# Altium PCB Driver Controller Tester.PcbDoc
Units mil, origin at the board's own origin, x right, y up, seen from the top; angles counter-clockwise.
Board outline 3315 x 3238 mil, 2 copper layers (Top Layer, Bottom Layer); 69 components, 59 nets, 225 pads, 27 vias.
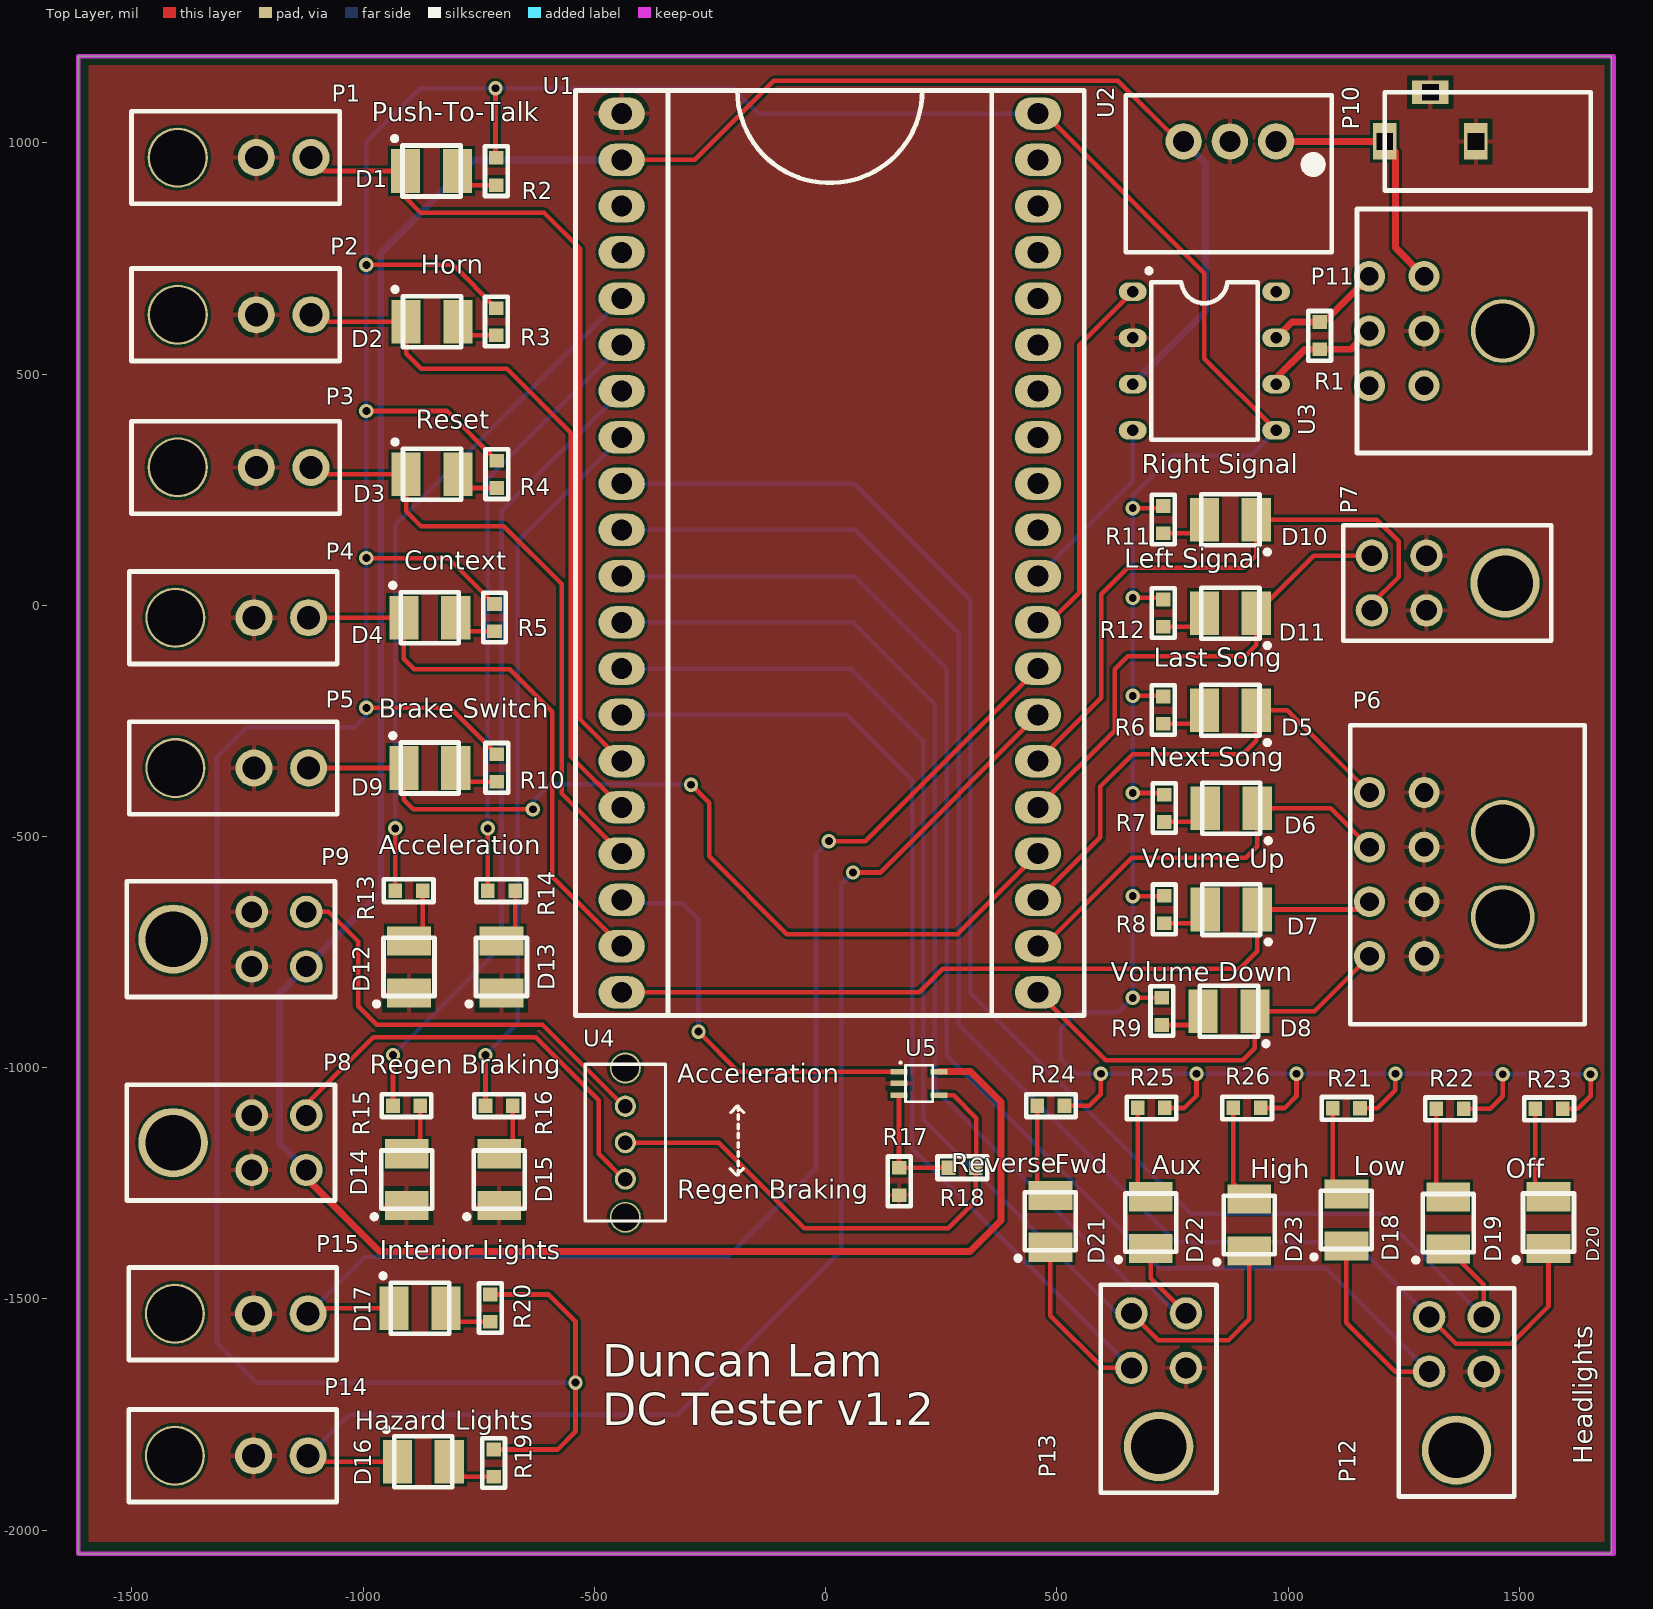
[diagram p0: Top Layer view]
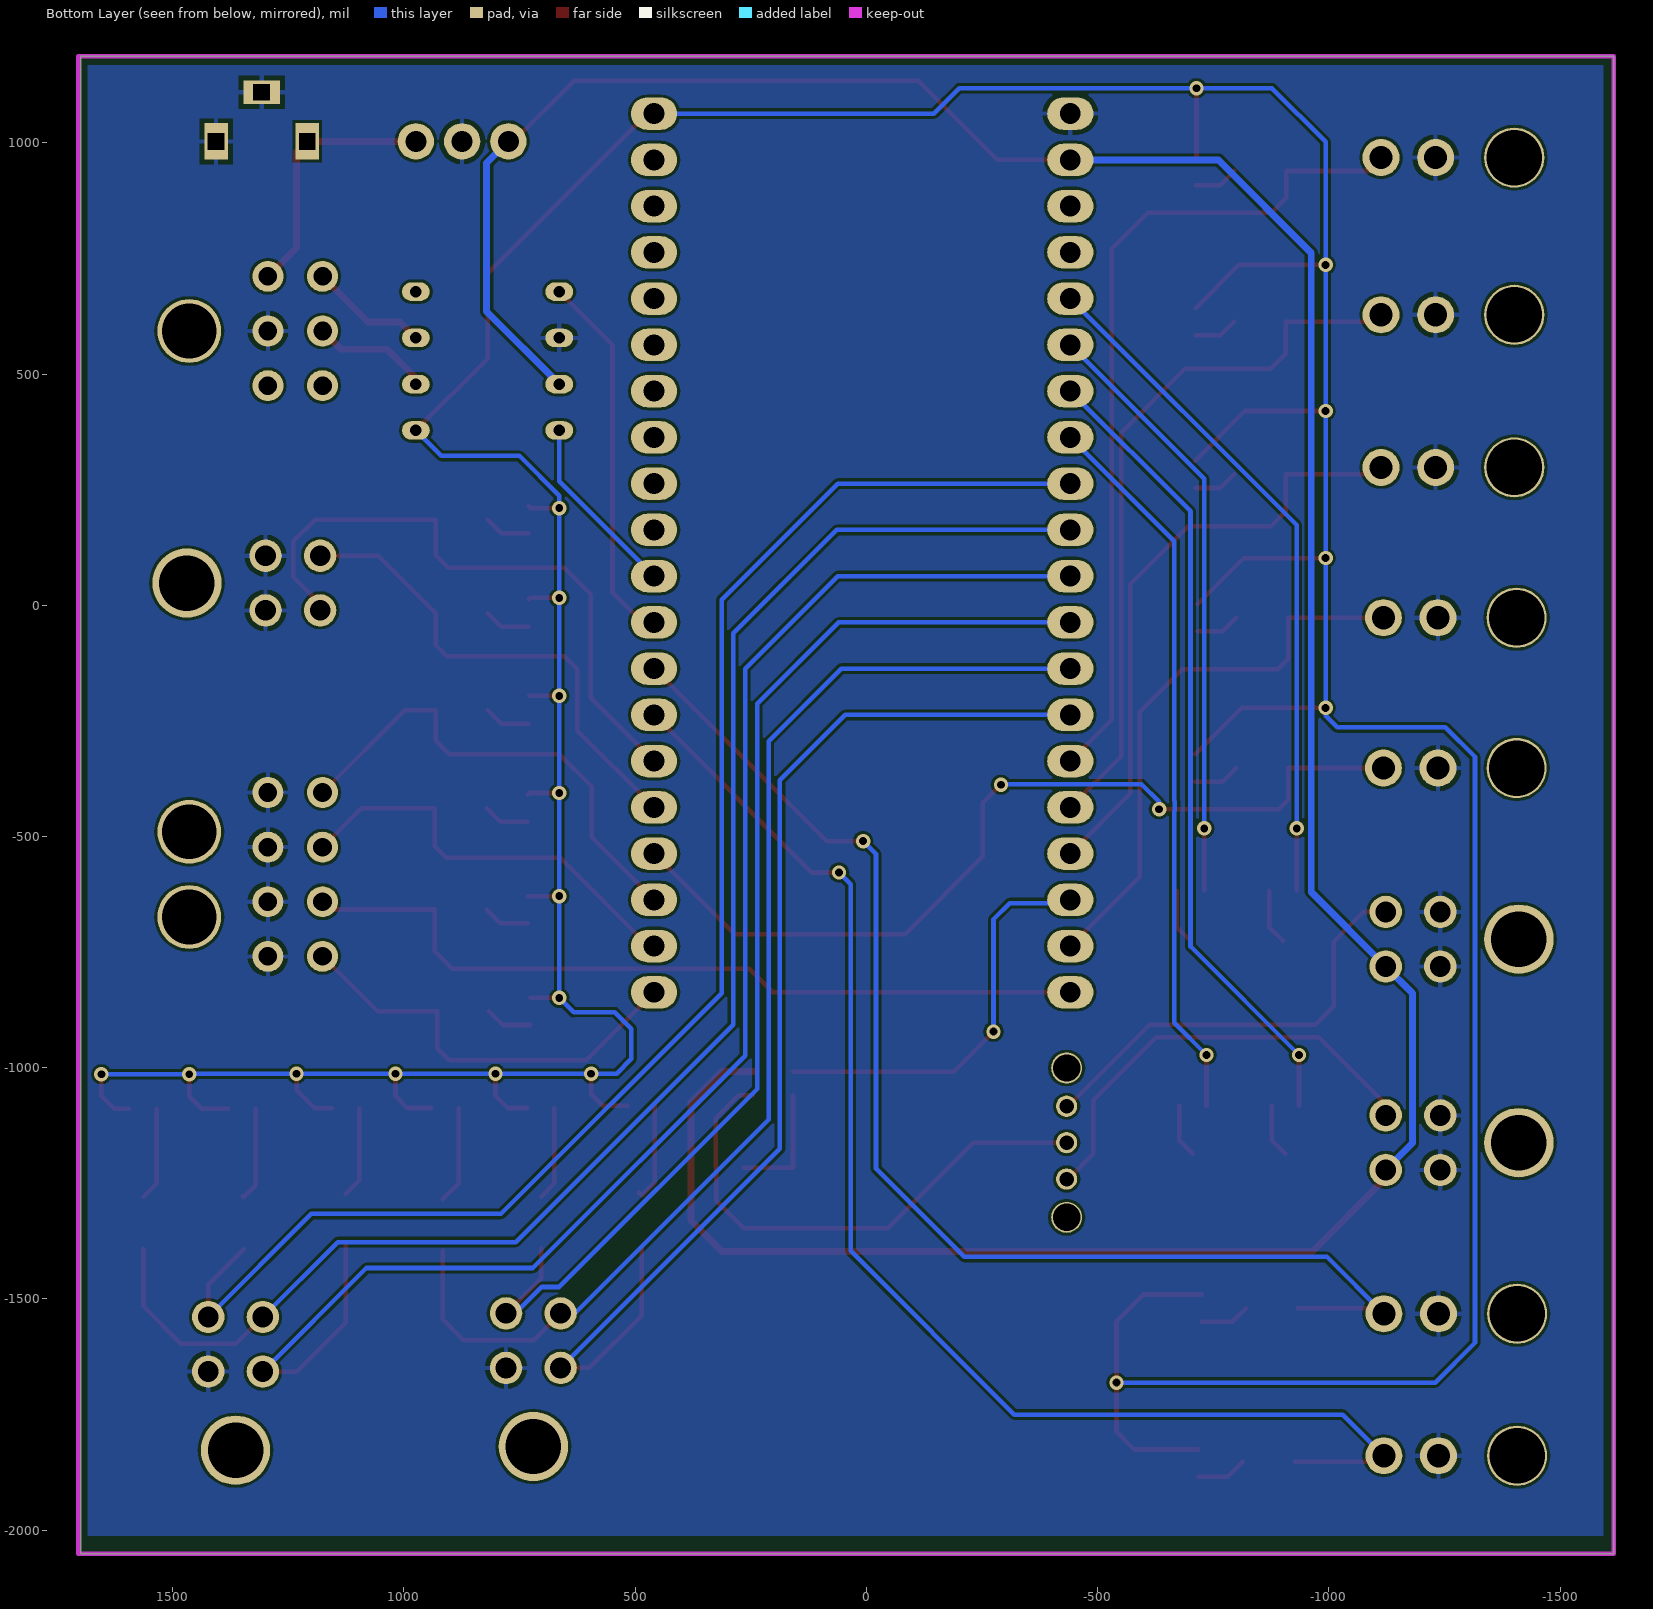
[diagram p1: Bottom Layer view, seen from below]
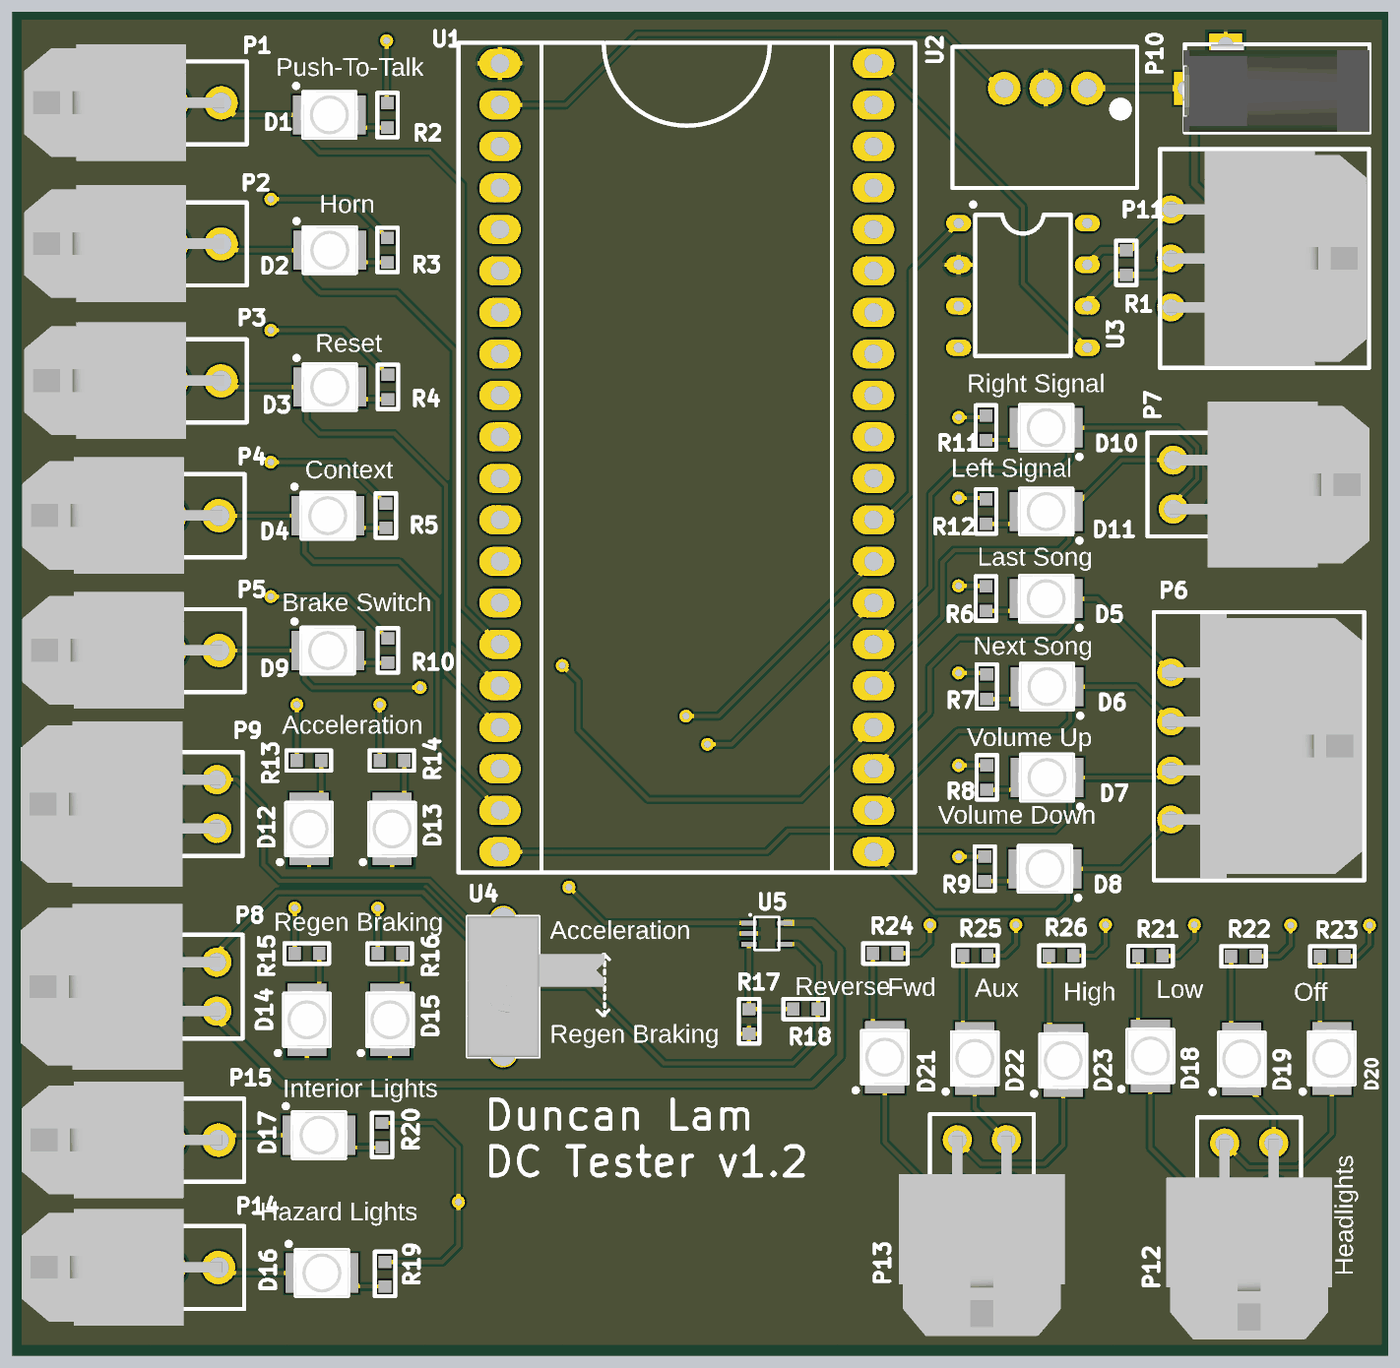
[diagram p2: 3D render of the assembled board from above, using the file's embedded part models]

## Layer stack, top to bottom
Top Solder: solder mask 0.4, Solder Resist, Dk 3.5
Top Layer: signal copper 1.4
Dielectric 1: dielectric 12.6, FR-4, Dk 4.8
Bottom Layer: signal copper 1.4
Bottom Solder: solder mask 0.4, Solder Resist, Dk 3.5

## Board outline
-1616,-2051 1699,-2051 1699,1187 -1616,1187

## Design rules (kind name [scope] priority, off if disabled: settings)
BoardOutlineClearance [All] p1: gap=15
Clearance [All] p1: gap=6
DiffPairsRouting [All] p1: maxlimit=10 minlimit=10 mostfreqgap=10 toplayer_minwidth=15 toplayer_maxwidth=15 toplayer_prefwidth=15 bottomlayer_minwidth=15 bottomlayer_maxwidth=15 bottomlayer_prefwidth=15 maxuncoupledlength=500
HoleSize [All] p1: absolutevalues=TRUE maxlimit=100 minlimit=13 maxpercent=80.000 minpercent=20.000
MinimumAnnularRing [All] p1: minimumring=7
PolygonConnect [All] p1: connectstyle=Relief reliefconductorwidth=10 reliefentries=4 polygonreliefangle="90 Angle" airgapwidth=10
RoutingVias [All] p1: holewidth=28 width=50 viastyle="Through Hole" minholewidth=28 minwidth=50 maxholewidth=28 maxwidth=50
SolderMaskExpansion [All] p1: expansion=4
Width 12V [(InNet('12V') AND InNet('5V'))] p1: maxlimit=20 minlimit=15 preferedwidth=16
Width Width_1 [All] p2: maxlimit=15 minlimit=10 preferedwidth=10
28 further rules are at their usual default settings.

## Classes and differential pairs
component class "Driver Controller Tester": D12 D13 D14 D15 P8 P9 P10 P11 R1 R13 R14 R15 R16 R17 R18 U1 U2 U3 U4 U5
component class Connectors: D1 D2 D3 D4 D5 D6 D7 D8 D9 D10 D11 D16 D17 D18 D19 D20 D21 D22 D23 P1 P2 P3 P4 P5 P6 P7 P12 P13 P14 P15 R2 R3 R4 R5 R6 R7 R8 R9 R10 R11 R12 R19 R20 R21 R22 R23 R24 R25 R26
differential pair CAN1: +CAN1_P -CAN1_N

## Components (designator, comment, footprint, x,y, rotation, side; value= is the part's Value field where it differs from the comment)
D1 "LED RED" "RED LED" -852,939 r270 top
D2 "LED RED" "RED LED" -851,613 r270 top
D3 "LED RED" "RED LED" -851,283 r270 top
D4 "LED RED" "RED LED" -856,-27 r270 top
D5 "LED RED" "RED LED" 875,-227 r90 top
D6 "LED RED" "RED LED" 877,-439 r90 top
D7 "LED RED" "RED LED" 877,-658 r90 top
D8 "LED RED" "RED LED" 872,-878 r90 top
D9 "LED RED" "RED LED" -856,-352 r270 top
D10 "LED RED" "RED LED" 875,185 r90 top
D11 "LED RED" "RED LED" 875,-17 r90 top
D12 "LED RED" "RED LED" -901,-782 r0 top
D13 "LED RED" "RED LED" -701,-782 r0 top
D14 "LED RED" "RED LED" -906,-1242 r0 top
D15 "LED RED" "RED LED" -706,-1242 r0 top
D16 "LED RED" "RED LED" -870,-1852 r270 top
D17 "LED RED" "RED LED" -877,-1520 r270 top
D18 "LED RED" "RED LED" 1126,-1329 r0 top
D19 "LED RED" "RED LED" 1346,-1336 r0 top
D20 "LED RED" "RED LED" 1563,-1335 r0 top
D21 "LED RED" "RED LED" 486,-1332 r0 top
D22 "LED RED" "RED LED" 703,-1335 r0 top
D23 "LED RED" "RED LED" 916,-1340 r0 top
P1 "SCH_MLX_1X2" PCB_MLX_MICROFIT_1X2 -1401,968 r270 top
P2 "SCH_MLX_1X2" PCB_MLX_MICROFIT_1X2 -1401,628 r270 top
P3 "SCH_MLX_1X2" PCB_MLX_MICROFIT_1X2 -1401,298 r270 top
P4 "SCH_MLX_1X2" PCB_MLX_MICROFIT_1X2 -1406,-27 r270 top
P5 "SCH_MLX_1X2" PCB_MLX_MICROFIT_1X2 -1406,-352 r270 top
P6 "MICROFIT_4X2" PCB_MLX_MICROFIT_4X2 1294,-582 r90 top
P7 "MLX_MICROFIT_2X2" MLX_MICROFIT_2X2 1469,48 r90 top
P8 "MLX_MICROFIT_2X2" MLX_MICROFIT_2X2 -1411,-1162 r270 top
P9 "MLX_MICROFIT_2X2" MLX_MICROFIT_2X2 -1411,-722 r270 top
P10 "PJ-007" "BARREL JACK PJ007" 1209,1003 r180 top
P11 "CAN1" PCB_MLX_MICROFIT_3X2 1464,593 r90 top
P12 "MLX_MICROFIT_2X2" MLX_MICROFIT_2X2 1364,-1827 r0 top
P13 "MLX_MICROFIT_2X2" MLX_MICROFIT_2X2 720,-1819 r0 top
P14 "SCH_MLX_1X2" PCB_MLX_MICROFIT_1X2 -1407,-1839 r270 top
P15 "SCH_MLX_1X2" PCB_MLX_MICROFIT_1X2 -1407,-1532 r270 top
R1 "120" PCB_GENERIC_SMD_0603 1068,583 r270 top
R2 "SCH_GENERIC_RESISTOR_0603" PCB_GENERIC_SMD_0603 -712,938 r90 top
R3 "SCH_GENERIC_RESISTOR_0603" PCB_GENERIC_SMD_0603 -712,613 r90 top
R4 "SCH_GENERIC_RESISTOR_0603" PCB_GENERIC_SMD_0603 -711,283 r90 top
R5 "SCH_GENERIC_RESISTOR_0603" PCB_GENERIC_SMD_0603 -716,-27 r90 top
R6 "SCH_GENERIC_RESISTOR_0603" PCB_GENERIC_SMD_0603 730,-227 r90 top
R7 "SCH_GENERIC_RESISTOR_0603" PCB_GENERIC_SMD_0603 732,-439 r90 top
R8 "SCH_GENERIC_RESISTOR_0603" PCB_GENERIC_SMD_0603 732,-658 r90 top
R9 "SCH_GENERIC_RESISTOR_0603" PCB_GENERIC_SMD_0603 727,-878 r90 top
R10 "SCH_GENERIC_RESISTOR_0603" PCB_GENERIC_SMD_0603 -711,-352 r90 top
R11 "SCH_GENERIC_RESISTOR_0603" PCB_GENERIC_SMD_0603 730,185 r90 top
R12 "SCH_GENERIC_RESISTOR_0603" PCB_GENERIC_SMD_0603 730,-17 r90 top
R13 "SCH_GENERIC_RESISTOR_0603" PCB_GENERIC_SMD_0603 -901,-617 r180 top
R14 "SCH_GENERIC_RESISTOR_0603" PCB_GENERIC_SMD_0603 -701,-617 r180 top
R15 "SCH_GENERIC_RESISTOR_0603" PCB_GENERIC_SMD_0603 -906,-1082 r180 top
R16 "SCH_GENERIC_RESISTOR_0603" PCB_GENERIC_SMD_0603 -706,-1082 r180 top
R17 "SCH_GENERIC_RESISTOR_0603" PCB_GENERIC_SMD_0603 159,-1246 r90 top
R18 "SCH_GENERIC_RESISTOR_0603" PCB_GENERIC_SMD_0603 295,-1216 r0 top
R19 "SCH_GENERIC_RESISTOR_0603" PCB_GENERIC_SMD_0603 -718,-1855 r90 top
R20 "SCH_GENERIC_RESISTOR_0603" PCB_GENERIC_SMD_0603 -725,-1520 r90 top
R21 "SCH_GENERIC_RESISTOR_0603" PCB_GENERIC_SMD_0603 1126,-1088 r0 top
R22 "SCH_GENERIC_RESISTOR_0603" PCB_GENERIC_SMD_0603 1350,-1089 r0 top
R23 "SCH_GENERIC_RESISTOR_0603" PCB_GENERIC_SMD_0603 1564,-1089 r0 top
R24 "SCH_GENERIC_RESISTOR_0603" PCB_GENERIC_SMD_0603 487,-1082 r0 top
R25 "SCH_GENERIC_RESISTOR_0603" PCB_GENERIC_SMD_0603 704,-1087 r0 top
R26 "SCH_GENERIC_RESISTOR_0603" PCB_GENERIC_SMD_0603 911,-1087 r0 top
U1 "LPC1768 mbed" "LPC 1768 mbed Layout" 9,113 r0 top
U2 "R78E-1.0 DC/DC" R78-1.0 874,1003 r180 top
U3 "MCP2562" MCP2562 819,528 r0 top
U4 "Slide Switch" "Slide Switch" -433,-1162 r0 top
U5 "MCP6001U" MCP6001UT 202,-1034 r0 top

## Footprints (in the part's own frame and the unit in brackets; to place one, negate y for a bottom-side part, rotate by r counter-clockwise, add the part's x,y. Pads: shape width x height; smd on the part's side, far side on the other; paste and mask are expansions set on the pad)
"BARREL JACK PJ007" [mm] "Pin connections for Barrel Jack"
  rect 1.3x2 hole 0.9 square: 1(0,0) 2(-5,0)
  rect 2x1.3 hole 0.9 square: 3(-2.5,-2.7)
  silkscreen extent -11.3,-2.7 0,2.7, body extent -11.31,-2.68 0.14,2.67, height 7.4
"LPC 1768 mbed Layout" [mil]
  oval 100x70 hole 45: 1(-450,950) 2(-450,850) 3(-450,750) 4(-450,650) 5(-450,550) 6(-450,450) 7(-450,350) 8(-450,250) 9(-450,150) 10(-450,50) 11(-450,-50) 12(-450,-150) 13(-450,-250) 14(-450,-350) 15(-450,-450) 16(-450,-550) 17(-450,-650) 18(-450,-750) 19(-450,-850) 20(-450,-950) 21(450,-950) 22(450,-850) 23(450,-750) 24(450,-650) 25(450,-550) 26(450,-450) 27(450,-350) 28(450,-250) 29(450,-150) 30(450,-50) 31(450,50) 32(450,150) 33(450,250) 34(450,350) 35(450,450) 36(450,550) 37(450,650) 38(450,750) 39(450,850) 40(450,950)
  silkscreen extent -550,-1000 550,1000, body extent -545,-990 545,1000, height 260
MCP2562 [mil]
  oval 60x40 hole 25: 1(-155,150) 2(-155,50) 3(-155,-50) 4(-155,-150) 5(155,-150) 6(155,-50) 7(155,50) 8(155,150)
  silkscreen extent -125,-170 115,200, body extent -115,-170 115,170, height 210
MCP6001UT [mm]
  rect 0.95x0.3 smd: 1(-1.1,0.65) 2(-1.1,0) 3(-1.1,-0.65) 4(1.1,-0.65) 5(1.1,0.65)
  silkscreen extent -1.04,-1 0.75,1.17
MLX_MICROFIT_2X2 [mil]
  round 70 hole 45: 1(59,170) 2(-59,170) 3(59,288) 4(-59,288)
  round 150 hole 120: ""(0,0)
  silkscreen extent -125,-100 125,350, body extent -200,-185 200,297, height 345
PCB_GENERIC_SMD_0603 [mm]
  rect 0.75x0.8 smd: 1(-0.75,0) 2(0.75,0)
  silkscreen extent -1.35,-0.63 1.38,0.63, body extent -0.75,-0.5 0.75,0.5, height 0.45
PCB_MLX_MICROFIT_1X2 [mil]
  round 80 hole 50: 1(0,170) 2(0,288)
  round 130 hole 120: ""(0,0)
  silkscreen extent -100,-100 100,350, body extent -141,-186 140,296, height 345
PCB_MLX_MICROFIT_3X2 [mm]
  round 1.7 hole 1.02: 1(3,4.32) 2(0,4.32) 3(-3,4.32) 4(3,7.32) 5(0,7.32) 6(-3,7.32)
  round 3.5 hole 3: ""(0,0)
  silkscreen extent -6.7,-4.8 6.7,8, body extent -6.57,-4.65 6.58,7.59, height 8.83
PCB_MLX_MICROFIT_4X2 [mm] "Molex MicroFit 4x2 Connector"
  round 3.5 hole 3: 0(-2.34,-4.32) 0(2.34,-4.32)
  round 1.7 hole 1.02: 1(4.5,0) 2(1.5,0) 3(-1.5,0) 4(-4.5,0) 5(4.5,3) 6(1.5,3) 7(-1.5,3) 8(-4.5,3)
  silkscreen extent -8.23,-8.82 8.2,4.05, body extent -8.07,-8.7 8.08,3.54, height 8.83
R78-1.0 [mm]
  round 2 hole 1.15: 1(-2.54,0) 2(0,0) 3(2.54,0)
  silkscreen extent -5.59,-2.54 5.71,6.1, body extent -4.44,-1.59 4.45,5.4, height 10.4
"RED LED" [mm]
  rect 2.4x1.6 smd: 1(0,-1.425) 2(0,1.425)
  silkscreen extent -1.9,-2.16 1.4,1.6, body extent -1.4,-1.75 1.4,1.75, height 1.88
"Slide Switch" [mm]
  round 1.168 hole 0.8: 1(0,2) 2(0,0) 3(0,-2)
  round 1.7 hole 1.5: ""(0,-4.1) ""(0,4.1)
  silkscreen extent -2.2,-4.3 6.2,4.3, body extent -2.2,-4.3 6.2,4.3, height 4.7

## Part data
P6: library part SCH_MLX_MICROFIT_4X2, "Molex Microfit Connector 4x2"
P10: library part Component_1
P11: library part SCH_MLX_MICROFIT_3X2
R1: library part SCH_GENERIC_RESISTOR_0603, "120 Ohms"
R2 R3 R4 R5 R6 R7 R8 R9 R10 R11 R12 R13 R14 R15 R16 R17 R18 R19 R20 R21 R22 R23 R24 R25 R26: "Generic SMD resistor 0603"
U2: library part R78E-1.0

## Via types
v1: diameter 31, hole 17, Top Layer to Bottom Layer, 27 vias

## Nets (pads, with @x,y where several pads share a name; then routed paths per layer and width w, separated by ;. In a path a pad name is that pad's centre, name@x,y a point inside that pad or via, vN(x,y) a via of type N, cw(c..) or ccw(c..) an arc to the next point about the centre after c; other vN are vias at no path point)
3.3V: R2.2 R3.2 R4.2 R5.2 R6.2 R7.2 R8.2 R9.2 R10.2 R11.2 R12.2 R19.2 R20.2 R21.2 R22.2 R23.2 R24.2 R25.2 R26.2 U1.40 U3.5 | length 12236.8
  Top Layer w10: v1(-993,-222) -811.47,-222 R10.2 ; v1(-993,102) -815.47,102 R5.2 ; v1(-993,420) -818.47,420 R4.2 ; v1(-993,736) -805.47,736 R3.2 ; R20.2 -598.53,-1490.47 -541,-1548 v1(-541,-1681) -541,-1787 -579.47,-1825.47 R19.2 ; v1(-714,1118) -714,969.53 R2.2 ; U1.40 474,1063 819,718 819,533 U3.5 ; R24.2 570,-1082 595,-1057 v1(595,-1013) ; v1(664,-849) R9.2@726.47,-849 ; v1(664,-629) R8.2@731.47,-629 ; v1(664,-406) 728.53,-406 R7.2 ; v1(664,-196) R6.2@728.53,-196 ; v1(664,16) 726.53,16 R12.2 ; v1(664,210) 725.47,210 R11.2 ; R25.2 775,-1087 802,-1060 v1(802,-1013) ; R26.2 993,-1087 1018,-1062 v1(1018,-1013) ; R21.2 1193,-1088 1232,-1049 v1(1232,-1013) ; R22.2 1437,-1089 1464,-1062 v1(1464,-1014) ; R23.2 1626,-1089 1654,-1061 v1(1654,-1014)
  Bottom Layer w10: v1(-541,-1681) -1230,-1681 -1316,-1595 -1316,-328 -1252,-264 -1018,-264 -993,-239 v1(-993,-222) v1(-993,102) v1(-993,420) v1(-993,736) -993,1002 -877,1118 v1(-714,1118) -201,1118 -146,1063 U1.40 ; U3.5 919,323 750,323 664,237 v1(664,210) v1(664,16) v1(664,-196) v1(664,-406) v1(664,-629) v1(664,-849) 633,-880 544,-880 508,-916 508,-981 540,-1013 v1(595,-1013) v1(802,-1013) v1(1018,-1013) v1(1232,-1013) v1@1464,-1013 ; v1(1464,-1014) v1(1654,-1014)
5V: P8.3 P9.3 U1.2 U2.3 U3.3 U5.5 | length 6681.6
  Top Layer w10: U1.2 -283,963 -112,1134 632,1134 763,1003 U2.3
  Top Layer w15: P8.3 -1123,-1239 -965,-1397 312,-1397 379,-1330 379,-1074 313.41,-1008.41 U5.5
  Bottom Layer w15: P8.3 -1181,-1163 -1181,-839 P9.3 -962,-620 -962,762 -761,963 U1.2 ; U3.3 821,635 821,956 U2.3
12V: P10.1 P11.1 U2.1 | length 562.1
  Top Layer w15: U2.1 P10.1 1232,980 1232,773.03 P11.1
ACCELERATION: P9.4 U4.1 | length 943.1
  Top Layer w10: P9.4 -1075,-663 -1011,-727 -1011,-867 -971,-907 -612.26,-907 U4.1@-436,-1083.26
ANALOG_OUT: U1.18 U5.1 | length 895.9
  Top Layer w10: v1(-275,-922) -188.59,-1008.41 U5.1
  Bottom Layer w10: U1.18 -434,-644 -310,-644 -275,-679 v1(-275,-922)
AUX: D23.1 P13.4 U1.13 | length 2604.1
  Top Layer w10: P13.4 719,-1589 871,-1589 916,-1544 D23.1
  Bottom Layer w10: U1.13 54,-137 211,-294 211,-1112 630,-1531 P13.4
"BRAKE SWITCH": D9.1 P5.2 U1.24 | length 1961.8
  Top Layer w10: P5.2 D9.1 -912.1,-420.9 -892,-441 v1(-633,-441) ; v1(-291,-388) -252,-427 -252,-543 -84,-711 285,-711 U1.24
  Bottom Layer w10: v1(-633,-441) -633,-425 -595,-387 v1@-289,-387
CAN1_N: P11.5 R1.2 U3.6 | length 257.1
  Top Layer w15: U3.6 974,491 1036.47,553.47 R1.2 1136.28,553.47 P11.5
CAN1_P: P11.4 R1.1 U3.7 | length 256.9
  Top Layer w15: U3.7 1008.53,612.53 R1.1 1077.23,612.53 P11.4
CONTEXT: D4.1 P4.2 U1.19 | length 1232.3
  Top Layer w10: P4.2 D4.1 -912.1,-115.9 -890,-138 -683,-138 -591,-230 -591,-587 U1.19
FORWARD: D22.1 P13.3 U1.12 | length 2498.2
  Top Layer w10: D22.1 703,-1455 P13.3
  Bottom Layer w10: U1.12 60,-37 236,-213 236,-1046 664,-1474 702,-1474 759,-1531 P13.3
GND: D12.1 D13.1 D14.1 D15.1 P1.1 P2.1 P3.1 P4.1 P5.1 P6.1 P6.2 P6.3 P6.4 P7.1 P7.2 P8.1 P8.2 P9.1 P9.2 P10.2 P10.3 P11.2 P12.1 P13.1 P14.1 P15.1 R17.1 U1.1 U2.2 U3.2 U5.2
"HAZARD LIGHTS": D16.1 P14.2 U1.27 | length 2904.4
  Top Layer w10: P14.2 -1106,-1852 D16.1 ; v1(59,-578) 118,-578 U1.27
  Bottom Layer w10: P14.2 -1030,-1750 -320,-1750 34,-1396 34,-603 v1(59,-578)
"HEADLIGHTS HIGH": D18.1 P12.2 U1.11 | length 3337.6
  Top Layer w10: D18.1 1126,-1551 1232,-1657 P12.2
  Bottom Layer w10: U1.11 62,63 262,-137 262,-974 721,-1433 1081,-1433 P12.2
"HEADLIGHTS LOW": D19.1 P12.3 U1.9 | length 3287.7
  Top Layer w10: D19.1 1423,-1469.1 P12.3
  Bottom Layer w10: U1.9 62,263 313,12 313,-839 790,-1316 1200,-1316 P12.3
"HEADLIGHTS OFF": D20.1 P12.4 U1.10 | length 3387
  Top Layer w10: P12.4 1363,-1597 1482,-1597 1563,-1516 D20.1
  Bottom Layer w10: U1.10 64,163 288,-61 288,-907 758,-1377 1143,-1377 P12.4
HORN: D2.1 P2.2 U1.16 | length 1563.5
  Top Layer w10: P2.2 -1098,613 D2.1 -907.1,544.1 -874,511 -689,511 -551,373 -551,-327 U1.16
"INTERIOR LIGHTS": D17.1 P15.2 U1.28 | length 2745
  Top Layer w10: P15.2 -1107,-1520 D17.1 ; v1(7,-510) 86,-510 U1.28
  Bottom Layer w10: P15.2 -996,-1409 -212,-1409 -21,-1218 -21,-538 v1(7,-510)
"LAST SONG": D5.1 P6.5 U1.23 | length 1063.4
  Top Layer w10: U1.23 594,-502 594,-392 664,-322 902,-322 931.1,-292.9 D5.1 998.06,-227 P6.5
NetD1_2: D1.2 R2.1 | length 96.5
  Top Layer w10: D1.2 -765.37,908.47 R2.1
NetD2_2: D2.2 R3.1 | length 95.1
  Top Layer w10: D2.2 -765.37,583.47 R3.1
NetD3_2: D3.2 R4.1 | length 96.1
  Top Layer w10: D3.2 -765.37,253.47 R4.1
NetD4_2: D4.2 R5.1 | length 96.1
  Top Layer w10: D4.2 -770.37,-56.53 R5.1
NetD5_2: D5.2 R6.1 | length 101.1
  Top Layer w10: R6.1 789.37,-256.53 D5.2
NetD6_2: D6.2 R7.1 | length 101.1
  Top Layer w10: R7.1 791.37,-468.53 D6.2
NetD7_2: D7.2 R8.1 | length 101.1
  Top Layer w10: R8.1 791.37,-687.53 D7.2
NetD8_2: D8.2 R9.1 | length 101.1
  Top Layer w10: R9.1 786.37,-907.53 D8.2
NetD9_2: D9.2 R10.1 | length 101.1
  Top Layer w10: D9.2 -770.37,-381.53 R10.1
NetD10_2: D10.2 R11.1 | length 101.1
  Top Layer w10: R11.1 789.37,155.47 D10.2
NetD11_2: D11.2 R12.1 | length 101.1
  Top Layer w10: R12.1 789.37,-46.53 D11.2
NetD12_2: D12.2 R13.1 | length 121.1
  Top Layer w10: D12.2 -871.47,-696.37 R13.1
NetD13_2: D13.2 R14.1 | length 121.1
  Top Layer w10: D13.2 -671.47,-696.37 R14.1
NetD14_2: D14.2 R15.1 | length 116.1
  Top Layer w10: D14.2 -876.47,-1156.37 R15.1
NetD15_2: D15.2 R16.1 | length 116.1
  Top Layer w10: D15.2 -676.47,-1156.37 R16.1
NetD16_2: D16.2 R19.1 | length 109.4
  Top Layer w10: D16.2 -781.37,-1884.53 R19.1
NetD17_2: D17.2 R20.1 | length 108.1
  Top Layer w10: D17.2 -791.37,-1549.53 R20.1
NetD18_2: D18.2 R21.1 | length 197.1
  Top Layer w10: R21.1 1096.47,-1243.37 D18.2
NetD19_2: D19.2 R22.1 | length 204.3
  Top Layer w10: R22.1 1320.47,-1254.37 D19.2 D19.2@1348,-1277.9
NetD20_2: D20.2 R23.1 | length 201.7
  Top Layer w10: R23.1 1534.47,-1250.37 D20.2
NetD21_2: D21.2 R24.1 | length 214.2
  Top Layer w10: R24.1 457.47,-1247.37 D21.2 D21.2@492,-1269.9
NetD22_2: D22.2 R25.1 | length 203.7
  Top Layer w10: R25.1 674.47,-1250.37 D22.2
NetD23_2: D23.2 R26.1 | length 211.2
  Top Layer w10: R26.1 881.47,-1249.37 D23.2
NetR13_2: R13.2 U1.5 | length 1482.8
  Top Layer w10: R13.2 v1(-930.53,-482.47)
  Bottom Layer w10: v1(-930.53,-482.47) -930.53,173.47 U1.5
NetR14_2: R14.2 U1.6 | length 1299.9
  Top Layer w10: R14.2 v1(-730.53,-482.47)
  Bottom Layer w10: v1(-730.53,-482.47) -730.53,273.47 U1.6
NetR15_2: R15.2 U1.7 | length 1749.8
  Top Layer w10: R15.2 v1(-935.53,-972.47)
  Bottom Layer w10: v1(-935.53,-972.47) -701,-737.94 -701,203 U1.7
NetR16_2: R16.2 U1.8 | length 1567.8
  Top Layer w10: R16.2 v1(-735.53,-972.47)
  Bottom Layer w10: v1(-735.53,-972.47) -666,-902.94 -666,-445.36 -667,-444.36 -667,-423.64 -666,-422.64 -666,138 U1.8
NetR17_2: R17.2 R18.1 U5.3 | length 263.7
  Top Layer w10: U5.3 158.69,-1216.17 R17.2 159.47,-1216 R18.1
NetR18_2: R18.2 U4.2 U5.4 | length 1142.1
  Top Layer w10: U4.2@-436,-1162 -231,-1162 -46,-1347 265,-1347 324.53,-1287.47 R18.2 326,-1214.53 326,-1109 276.59,-1059.59 U5.4
NetU1_29: U1.29 U3.1 | length 814.6
  Top Layer w10: U1.29 484,-37 549,28 549,563 U3.1
NetU1_30: U1.30 U3.4 | length 399.9
  Bottom Layer w10: U1.30 664,268 U3.4
"NEXT SONG": D6.1 P6.6 U1.22 | length 923.1
  Top Layer w10: U1.22 471,-737 662,-546 908,-546 933.1,-520.9 D6.1 1091.94,-439 P6.6
PUSH-TO-TALK: D1.1 P1.2 U1.15 | length 1842.8
  Top Layer w10: P1.2 -1084,939 D1.1 -908.1,881.1 -876,849 -609,849 -531,771 -531,-247 U1.15
"REGEN BRAKING": P8.4 U4.3 | length 965.9
  Top Layer w10: P8.4 -1123,-1079 -978,-934 -627,-934 -491,-1070 -491,-1185.74 U4.3@-436,-1240.74
RESET: D3.1 P3.2 U1.17 | length 1330
  Top Layer w10: P3.2 -1098,283 D3.1 -907.1,203.1 -875,171 -696,171 -571,46 -571,-407 U1.17
REVERSE: D21.1 P13.2 U1.14 | length 2523.4
  Top Layer w10: D21.1 486,-1536 599,-1649 P13.2
  Bottom Layer w10: U1.14 46,-237 187,-378 187,-1175 P13.2
"SIGNAL LIGHTS LEFT": D11.1 P7.3 U1.25 | length 1065.6
  Top Layer w10: U1.25 625,-271 625,-138 653,-110 907,-110 931.1,-85.9 D11.1 1055.1,107 P7.3
"SIGNAL LIGHTS RIGHT": D10.1 P7.4 U1.26 | length 1365
  Top Layer w10: U1.26 596,-200 596,24 653,81 904,81 931.1,108.1 D10.1 1192,185 1239,138 1239,61 1181,3 P7.4
"VOLUME DOWN": D8.1 P6.8 U1.21 | length 917.7
  Top Layer w10: U1.21 606,-984 902,-984 928.1,-957.9 D8.1 1057.06,-878 P6.8
"VOLUME UP": D7.1 P6.7 U1.20 | length 1750.7
  Top Layer w10: U1.20 202,-837 253,-786 895,-786 933.1,-747.9 D7.1 1158.94,-658 P6.7
pads on no net: P1. P2. P3. P4. P5. P6.0 P7. P8. P9. P11. P11.3 P11.6 P12. P13. P14. P15. U1.3 U1.4 U1.31 U1.32 U1.33 U1.34 U1.35 U1.36 U1.37 U1.38 U1.39 U3.8 U4.

## Polygon pours and split planes (outlines as drawn)
GND on Top Layer "GND_top" (solid, remove dead copper, pour order 4): -1592.96,1168 1695.04,1168 1695.04,-1426.81 1695.04,-2025.32 1096.52,-2025.32 -1592.96,-2025.32
GND on Bottom Layer "GND_bottom" (solid, remove dead copper, pour order 8): -1593.5,1168 1694.5,1168 1694.5,-1425.93 1694.5,-2012 1108.43,-2012 -1593.5,-2012

## Keep-outs
Keep-Out Layer:
  lines w10: -1616,-2051 1704,-2051 1704,1187 -1616,1187 -1616,1138 -1616,-2051

## Silkscreen, mask and mechanical layers (free items; w line width, h text height)
Top Overlay:
  lines w7: -206.68,-1218.24 -192.94,-1231.98 ; -205.65,-1097 -191.91,-1083.26 ; -191.91,-1231.85 -178.17,-1218.11 ; -190.87,-1083.13 -177.13,-1096.87
  text "Push-To-Talk" at -981,1033 h70
  text "Horn" at -876,703 h70
  text "Reset" at -886,368 h70
  text "Right Signal" at 684,271 h70
  text "Left Signal" at 646,67 h70
  text "Context" at -911,63 h70
  text "Last Song" at 709,-147 h70
  text "Brake Switch" at -966,-257 h70
  text "Next Song" at 699,-362 h70
  text "Acceleration" at -966,-552 h70
  text "Volume Up" at 684,-582 h70
  text "Volume Down" at 616,-827 h70
  text "Regen Braking" at -986,-1027 h70
  text "Acceleration" at -321,-1047 h70
  text "Reverse" at 272,-1240 h70
  text "Fwd" at 495,-1242 h70
  text "Aux" at 705,-1244 h70
  text "Low" at 1142,-1247 h70
  text "Off" at 1471,-1252 h70 r359.74
  text "High" at 918,-1253 h70
  text "Regen Braking" at -321,-1297 h70
  text "Interior Lights" at -964,-1428 h70
  text "Duncan Lam / DC Tester v1.2" at -483,-1773 h70
  text "Hazard Lights" at -1018,-1797 h70
  text "Headlights" at 1672,-1857 h70 r90